# Altium PCB VIrtex_XC7vx690t_2ffg1927i_T_B.PcbDoc (part 4 of 5)
Units mm, origin at the board's own origin, x right, y up, seen from the top; angles counter-clockwise.
Board outline 230 x 148 mm, 12 copper layers (Top Layer 1, GND_IN_Layer, 1_V_IN_layer, 1.2_V_IN_layer, 1.8_V_IN_layer, 3.3_V_IN_layer, IN_Layer 6, IN_Layer 7, IN_Layer 8, IN_Layer 9, IN_Layer 10, Bottom Layer), stack 1.452 mm thick; 73 components, 655 nets, 2765 pads, 42 vias.
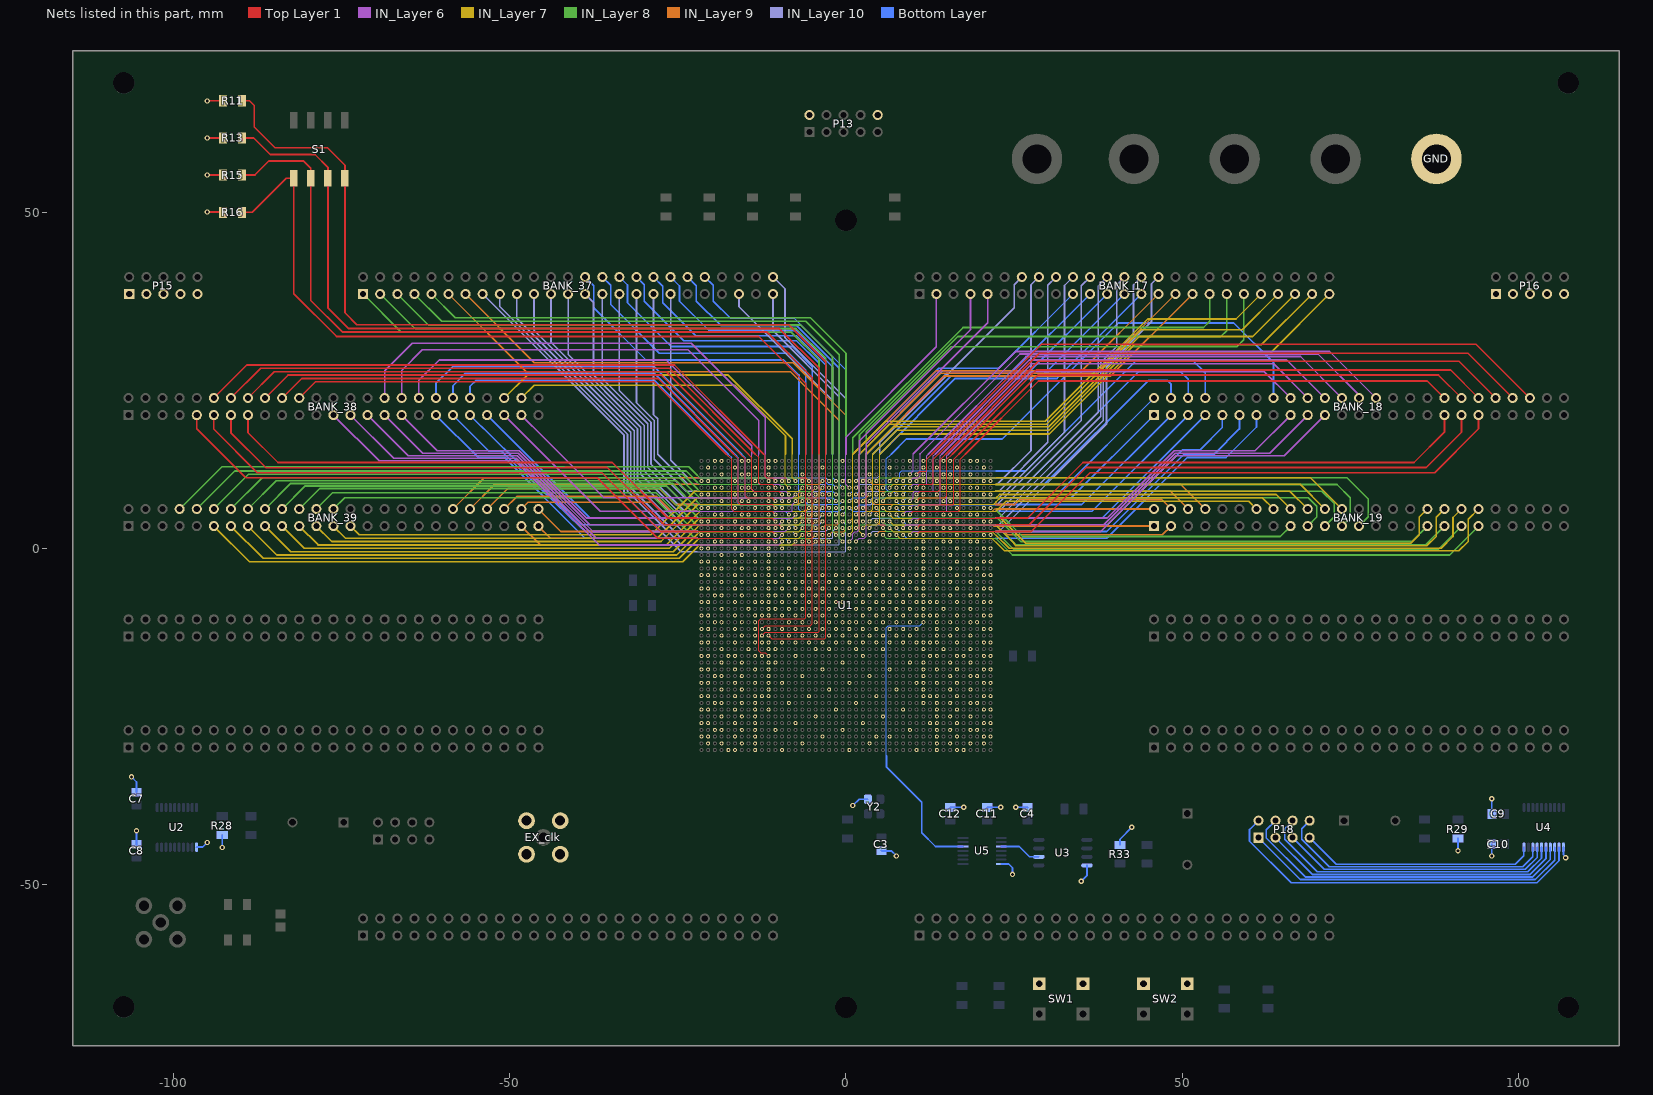
[diagram p14: the nets of this part, all layers, seen from the top]

## Via types
v1: diameter 0.8, hole 0.4, Top Layer 1 to Bottom Layer, 42 vias

## Nets (pads, with @x,y where several pads share a name; then routed paths per layer and width w, separated by ;. In a path a pad name is that pad's centre, name@x,y a point inside that pad or via, vN(x,y) a via of type N, cw(c..) or ccw(c..) an arc to the next point about the centre after c; other vN are vias at no path point) (continued)
C32: BANK_18.28 U1.C32 | length 81.2
  IN_Layer 6 w0.14: U1.C32@9.5,11 10.01,11.51 10.01,14
  IN_Layer 6 w0.254: 10.01,14 10.01,14.039 25.225,29.254 71.906,29.254 BANK_18.28@78.82,22.34
C33: BANK_18.46 U1.C33 | length 103.5
  Top Layer 1 w0.14: U1.C33@10.5,11 10.99,11.49 11.928,11.49 12.01,11.572 12.01,13.26 12.75,14
  Top Layer 1 w0.254: 12.75,14 29.081,30.331 93.689,30.331 BANK_18.46@101.68,22.34
CCLK_SPI_Flash: U3.6 U5.A2 | length 6.2
  Bottom Layer w0.254: U5.A2@23.1,-44.35 25.749,-44.35 27.284,-45.885 U3.6@28.675,-45.885
CCLK_SPI_Flash_1.8: U1.AE34 U5.B2 | length 45.5
  Bottom Layer w0.14: 6.01,-30.9 6.01,-11.797 6.307,-11.5 11,-11.5 U1.AE34@11.5,-11
  Bottom Layer w0.254: 6.01,-30.9 6.01,-32.51 11.25,-37.75 11.25,-42.298 13.302,-44.35 U5.B2@17.4,-44.35
CFG_BUS: R16.2 S1.1 U1.AK11 | length 156.9
  Top Layer 1 w0.14: U1.AK11@-11.5,-16 -11.99,-15.51 -12.683,-15.51 -12.99,-15.203 -12.99,-10.797 -12.703,-10.51 -6.149,-10.51 -6,-10.361 -6,14
  Top Layer 1 w0.254: R16.2@-89.81,49.945 -88.305,49.945 -83.21,55.04 S1.1@-82.12,55.04 -82.12,37.87 -75.75,31.5 -13,31.5 -6,24.5 -6,14
D12: BANK_38.12 U1.D12 | length 94.4
  Top Layer 1 w0.14: -12.25,14 -11.99,13.74 -11.99,10.74 -11.75,10.5 -11,10.5 U1.D12@-10.5,10
  Top Layer 1 w0.254: BANK_38.12@-94,22.34 -89.09,27.25 -25.5,27.25 -12.25,14
D14: BANK_38.32 U1.D14 | length 79.5
  IN_Layer 6 w0.14: -11.99,14 -11.99,10.629 -11.851,10.49 -8.99,10.49 U1.D14@-8.5,10
  IN_Layer 6 w0.254: BANK_38.32@-68.6,22.34 -68.6,26.4 -64.5,30.5 -23,30.5 -11.99,19.49 -11.99,14
D15: BANK_38.46 U1.D15 | length 54.6
  IN_Layer 7 w0.14: -8.01,14 -8.01,10.51 U1.D15@-7.5,10
  IN_Layer 7 w0.254: BANK_38.46@-50.82,22.34 -47.41,25.75 -17.497,25.75 -8.01,16.263 -8.01,14
D16: BANK_39.8 U1.D16 | length 96.1
  IN_Layer 8 w0.14: -22.1,10.85 -21.74,10.49 -6.99,10.49 U1.D16@-6.5,10
  IN_Layer 8 w0.254: BANK_39.8@-99.08,5.84 -92.794,12.126 -23.376,12.126 -22.1,10.85
D17: BANK_39.40 U1.D17 | length 55.1
  IN_Layer 9 w0.14: -22.1,10.5 -6,10.5 U1.D17@-5.5,10
  IN_Layer 9 w0.254: BANK_39.40@-58.44,5.84 -53.78,10.5 -22.1,10.5
D19: BANK_39.42 U1.D19 | length 54.1
  IN_Layer 9 w0.14: -22.1,9.5 -4,9.5 U1.D19@-3.5,10
  IN_Layer 9 w0.254: BANK_39.42@-55.9,5.84 -52.24,9.5 -22.1,9.5
D20: BANK_37.37 U1.D20 | length 49.6
  IN_Layer 10 w0.14: -22.1,10.5 -3,10.5 U1.D20@-2.5,10
  IN_Layer 10 w0.254: BANK_37.37@-26.08,37.8 -26.08,13.08 -23.5,10.5 -22.1,10.5
D21: BANK_37.38 U1.D21 | length 48.1
  Bottom Layer w0.14: -2,14.25 -2,10.5 U1.D21@-1.5,10
  Bottom Layer w0.254: BANK_37.38@-26.08,40.34 -24.75,39.01 -24.75,36.75 -20.377,32.377 -7.377,32.377 -2,27 -2,14.25
D22: BANK_37.42 U1.D22 | length 44.8
  Bottom Layer w0.14: U1.D22@-0.5,10 -0.449,10 -0.01,10.439 -0.01,14
  Bottom Layer w0.254: BANK_37.42@-21,40.34 -19.75,39.09 -19.75,36.75 -17.232,34.232 -7.732,34.232 -0.01,26.51 -0.01,14
D24: BANK_17.14 U1.D24 | length 42.1
  IN_Layer 10 w0.14: U1.D24@1.5,10 1.99,10.49 4.683,10.49 5.01,10.817 5.01,14
  IN_Layer 10 w0.254: 5.01,14 5.01,15.76 25,35.75 25,39.2 BANK_17.14@26.14,40.34
D25: BANK_17.33 U1.D25 | length 62.6
  IN_Layer 9 w0.14: U1.D25@2.5,10 3,10.5 3,14
  IN_Layer 9 w0.254: 3,14 14.631,25.631 39.371,25.631 BANK_17.33@51.54,37.8
D26: BANK_19.8 U1.D26 | length 51.6
  IN_Layer 9 w0.14: U1.D26@3.5,10 4.01,9.49 22.3,9.49
  IN_Layer 9 w0.254: 22.3,9.49 49.77,9.49 BANK_19.8@53.42,5.84
D27: BANK_19.25 U1.D27 | length 79.3
  IN_Layer 8 w0.14: U1.D27@4.5,10 5,10.5 22.3,10.5
  IN_Layer 8 w0.254: 22.3,10.5 74.5,10.5 77.67,7.33 77.67,4.69 BANK_19.25@76.28,3.3
D29: BANK_19.24 U1.D29 | length 69.4
  IN_Layer 7 w0.14: U1.D29@6.5,10 7,10.5 22.3,10.5
  IN_Layer 7 w0.254: 22.3,10.5 69.08,10.5 BANK_19.24@73.74,5.84
D30: BANK_18.8 U1.D30 | length 58.3
  Bottom Layer w0.14: U1.D30@7.5,10 8.01,10.51 8.01,11.203 8.307,11.5 22.3,11.5
  Bottom Layer w0.254: 22.3,11.5 26.75,11.5 43.25,28 51.5,28 53.42,26.08 BANK_18.8@53.42,22.34
D31: BANK_18.6 U1.D31 | length 52.4
  Bottom Layer w0.14: U1.D31@8.5,10 8.99,10.49 22.3,10.49
  Bottom Layer w0.254: 22.3,10.49 27.74,10.49 43.5,26.25 49.75,26.25 50.88,25.12 BANK_18.6@50.88,22.34
D32: BANK_18.26 U1.D32 | length 79.4
  IN_Layer 6 w0.14: U1.D32@9.5,10 9.99,10.49 10.683,10.49 11.01,10.817 11.01,14
  IN_Layer 6 w0.254: 11.01,14 11.01,14.01 25.88,28.88 70.191,28.88 76.042,23.03 76.042,22.578 BANK_18.26@76.28,22.34
E12: BANK_38.14 U1.E12 | length 92.3
  Top Layer 1 w0.14: -13.5,14 -13.01,13.51 -13.01,9.76 -12.74,9.49 -10.99,9.49 U1.E12@-10.5,9
  Top Layer 1 w0.254: BANK_38.14@-91.46,22.34 -87.05,26.75 -26.25,26.75 -13.5,14
E13: BANK_38.34 U1.E13 | length 75.9
  IN_Layer 6 w0.14: -12.99,14 -12.99,9.639 -12.851,9.5 -10,9.5 U1.E13@-9.5,9
  IN_Layer 6 w0.254: BANK_38.34@-66.06,22.34 -66.06,26.44 -63,29.5 -24,29.5 -23.5,29.5 -12.99,18.99 -12.99,14
E14: BANK_38.48 U1.E14 | length 51.1
  IN_Layer 7 w0.14: -9,14 -9,9.5 U1.E14@-8.5,9
  IN_Layer 7 w0.254: BANK_38.48@-48.28,22.34 -46.37,24.25 -16.526,24.25 -9,16.724 -9,14
E16: BANK_39.27 U1.E16 | length 70.6
  IN_Layer 7 w0.14: -22.1,8.49 -7.01,8.49 U1.E16@-6.5,9
  IN_Layer 7 w0.254: BANK_39.27@-73.68,3.3 -72.38,2 -29,2 -22.51,8.49 -22.1,8.49
E17: BANK_39.10 U1.E17 | length 94.4
  IN_Layer 8 w0.14: -22.1,9.826 -21.784,9.51 -6.01,9.51 U1.E17@-5.5,9
  IN_Layer 8 w0.254: BANK_39.10@-96.54,5.84 -90.88,11.5 -23.774,11.5 -22.1,9.826
E18: BANK_39.44 U1.E18 | length 53
  IN_Layer 9 w0.14: -22.1,6.51 -7.24,6.51 -7.01,6.74 -7.01,8.183 -6.683,8.51 -4.99,8.51 U1.E18@-4.5,9
  IN_Layer 9 w0.254: BANK_39.44@-53.36,5.84 -50.303,8.897 -27.77,8.897 -25.383,6.51 -22.1,6.51
E19: BANK_39.46 U1.E19 | length 51.7
  IN_Layer 9 w0.14: -22.1,5.5 -6.307,5.5 -6.005,5.802 -6.005,7.188 -5.703,7.49 -4.317,7.49 -4.01,7.797 -4.01,8.49 U1.E19@-3.5,9
  IN_Layer 9 w0.254: BANK_39.46@-50.82,5.84 -48.91,7.75 -28.222,7.75 -25.972,5.5 -22.1,5.5
E21: BANK_37.36 U1.E21 | length 51.8
  Bottom Layer w0.14: -3,14 -3,9.807 -2.693,9.5 -2,9.5 U1.E21@-1.5,9
  Bottom Layer w0.254: BANK_37.36@-28.62,40.34 -27.25,38.97 -27.25,36.5 -22.366,31.616 -7.366,31.616 -3,27.25 -3,14
E22: BANK_37.40 U1.E22 | length 47.5
  Bottom Layer w0.14: -1,14 -1,9.5 U1.E22@-0.5,9
  Bottom Layer w0.254: BANK_37.40@-23.54,40.34 -22.25,39.05 -22.25,36.75 -18.638,33.138 -7.388,33.138 -1,26.75 -1,14
E23: BANK_17.3 U1.E23 | length 34.6
  IN_Layer 6 w0.14: 0,14 0,9.5 U1.E23@0.5,9
  IN_Layer 6 w0.254: 0,14 0,16.5 13.44,29.94 BANK_17.3@13.44,37.8
E24: BANK_17.16 U1.E24 | length 54.6
  IN_Layer 10 w0.14: U1.E24@1.5,9 2,9.5 22.5,9.5
  IN_Layer 10 w0.254: 22.5,9.5 27.5,14.5 27.5,39.16 BANK_17.16@28.68,40.34
E26: BANK_19.4 U1.E26 | length 47.8
  IN_Layer 9 w0.14: U1.E26@3.5,9 3.99,8.51 3.99,6.817 4.297,6.51 22.3,6.51
  IN_Layer 9 w0.254: 22.3,6.51 25.091,6.51 25.831,7.25 46.93,7.25 BANK_19.4@48.34,5.84
E27: BANK_19.6 U1.E27 | length 47.7
  IN_Layer 9 w0.14: U1.E27@4.5,9 4.5,8.999 4.99,8.509 22.3,8.509
  IN_Layer 9 w0.254: 22.3,8.509 48.211,8.509 BANK_19.6@50.88,5.84
E28: BANK_19.23 U1.E28 | length 75.2
  IN_Layer 8 w0.14: U1.E28@5.5,9 5.99,9.49 22.3,9.49
  IN_Layer 8 w0.254: 22.3,9.49 73.01,9.49 75,7.5 75,4.56 BANK_19.23@73.74,3.3
E29: BANK_19.22 U1.E29 | length 66.4
  IN_Layer 7 w0.14: U1.E29@6.5,9 7,9.5 22.3,9.5
  IN_Layer 7 w0.254: 22.3,9.5 67.54,9.5 BANK_19.22@71.2,5.84
E31: BANK_18.4 U1.E31 | length 48.8
  Bottom Layer w0.14: U1.E31@8.5,9 9,9.5 22.3,9.5
  Bottom Layer w0.254: 22.3,9.5 29.5,9.5 45,25 47.75,25 48.34,24.41 BANK_18.4@48.34,22.34
E32: BANK_18.24 U1.E32 | length 77.3
  IN_Layer 6 w0.14: U1.E32@9.5,9 10,9.5 11.918,9.5 12,9.582 12,13.75 12.25,14
  IN_Layer 6 w0.254: 12.25,14 26.756,28.506 67.574,28.506 BANK_18.24@73.74,22.34
E33: BANK_18.44 U1.E33 | length 101.7
  Top Layer 1 w0.14: U1.E33@10.5,9 10.99,9.49 12.74,9.49 12.99,9.74 12.99,13.24 13.75,14
  Top Layer 1 w0.254: 13.75,14 28.75,29 92.48,29 BANK_18.44@99.14,22.34
F13: BANK_38.16 U1.F13 | length 91.3
  Top Layer 1 w0.14: -14.5,14 -13.99,13.49 -13.99,8.797 -13.703,8.51 -10.01,8.51 U1.F13@-9.5,8
  Top Layer 1 w0.254: BANK_38.16@-88.92,22.34 -85.01,26.25 -26.75,26.25 -14.5,14
F14: BANK_38.36 U1.F14 | length 71
  IN_Layer 6 w0.14: -14.01,14 -14.01,8.76 -13.74,8.49 -8.99,8.49 U1.F14@-8.5,8
  IN_Layer 6 w0.254: BANK_38.36@-63.52,22.34 -63.52,24.98 -60.5,28 -26.75,28 -14.01,15.26 -14.01,14
F15: BANK_38.47 U1.F15 | length 46.1
  IN_Layer 6 w0.14: -22.1,7.51 -7.99,7.51 U1.F15@-7.5,8
  IN_Layer 6 w0.254: BANK_38.47@-48.28,19.8 -44.81,16.331 -35.99,7.51 -22.1,7.51
F16: BANK_39.25 U1.F16 | length 73.2
  IN_Layer 7 w0.14: -22.1,7.49 -7.01,7.49 U1.F16@-6.5,8
  IN_Layer 7 w0.254: BANK_39.25@-76.22,3.3 -74.42,1.5 -28.09,1.5 -22.1,7.49
F18: BANK_39.12 U1.F18 | length 92.9
  IN_Layer 8 w0.14: -22.1,8.826 -21.784,8.51 -5.01,8.51 U1.F18@-4.5,8
  IN_Layer 8 w0.254: BANK_39.12@-94,5.84 -88.84,11 -24.274,11 -22.1,8.826
F19: BANK_37.33 U1.F19 | length 52.8
  IN_Layer 10 w0.14: -22.1,8.5 -4,8.5 U1.F19@-3.5,8
  IN_Layer 10 w0.254: BANK_37.33@-31.16,37.8 -31.16,21.66 -28.5,19 -28.5,13.25 -23.75,8.5 -22.1,8.5
F20: BANK_37.35 U1.F20 | length 52.4
  IN_Layer 10 w0.14: -22.1,9.5 -3.307,9.5 -2.99,9.183 -2.99,8.49 U1.F20@-2.5,8
  IN_Layer 10 w0.254: BANK_37.35@-28.62,37.8 -28.62,19.87 -28,19.25 -28,14 -23.5,9.5 -22.1,9.5
F21: BANK_37.34 U1.F21 | length 55.4
  Bottom Layer w0.14: -4,14 -4,8.807 -3.683,8.49 -1.99,8.49 U1.F21@-1.5,8
  Bottom Layer w0.254: BANK_37.34@-31.16,40.34 -30,39.18 -30,36.75 -24.105,30.855 -7.355,30.855 -4,27.5 -4,14
F23: BANK_17.19 U1.F23 | length 48.8
  Bottom Layer w0.14: U1.F23@0.5,8 1,8.5 1,13.967 1.033,14
  Bottom Layer w0.254: 1.033,14 13.786,26.753 22.713,26.753 BANK_17.19@33.76,37.8
F24: BANK_17.21 U1.F24 | length 50.4
  Bottom Layer w0.14: U1.F24@1.5,8 2,8.5 2,14
  Bottom Layer w0.254: 2,14 14.379,26.379 24.879,26.379 BANK_17.21@36.3,37.8
F25: BANK_17.18 U1.F25 | length 55.8
  IN_Layer 10 w0.14: U1.F25@2.5,8 3,8.5 22.75,8.5
  IN_Layer 10 w0.254: 22.75,8.5 30,15.75 30,39.12 BANK_17.18@31.22,40.34
F26: BANK_19.2 U1.F26 | length 45.6
  IN_Layer 9 w0.14: U1.F26@3.5,8 3,7.5 3,5.592 3.082,5.51 21.784,5.51 22.114,5.84 22.3,5.84
  IN_Layer 9 w0.254: 22.3,5.84 BANK_19.2@45.8,5.84
F28: BANK_19.21 U1.F28 | length 72
  IN_Layer 8 w0.14: U1.F28@5.5,8 6,8.5 22.3,8.5
  IN_Layer 8 w0.254: 22.3,8.5 70.75,8.5 72.59,6.66 72.59,4.69 BANK_19.21@71.2,3.3
F29: BANK_19.20 U1.F29 | length 63.5
  IN_Layer 7 w0.14: U1.F29@6.5,8 7,8.5 22.3,8.5
  IN_Layer 7 w0.254: 22.3,8.5 66,8.5 BANK_19.20@68.66,5.84
F30: BANK_18.16 U1.F30 | length 80
  Bottom Layer w0.14: 6.721,14 6,13.279 6,8.75 6.26,8.49 7.01,8.49 U1.F30@7.5,8
  Bottom Layer w0.254: 6.721,14 8.971,16.25 23.25,16.25 40.5,33.5 57.66,33.5 63.58,27.58 BANK_18.16@63.58,22.34
F31: BANK_18.2 U1.F31 | length 43.2
  Bottom Layer w0.14: U1.F31@8.5,8 8.99,8.49 22.3,8.49
  Bottom Layer w0.254: 22.3,8.49 31.95,8.49 BANK_18.2@45.8,22.34
F33: BANK_18.42 U1.F33 | length 99.1
  Top Layer 1 w0.14: U1.F33@10.5,8 11.01,8.51 13.703,8.51 14,8.807 14,13.193 14.807,14
  Top Layer 1 w0.254: 14.807,14 28.598,27.791 91.149,27.791 BANK_18.42@96.6,22.34
G12: BANK_38.18 U1.G12 | length 88.3
  Top Layer 1 w0.14: -15.693,14 -15.01,13.317 -15.01,7.817 -14.703,7.51 -11.01,7.51 U1.G12@-10.5,7
  Top Layer 1 w0.254: BANK_38.18@-86.38,22.34 -82.97,25.75 -27.443,25.75 -15.693,14
G13: BANK_38.38 U1.G13 | length 66.4
  Bottom Layer w0.14: -15.5,14 -14.99,13.49 -14.99,7.582 -14.908,7.5 -10,7.5 U1.G13@-9.5,7
  Bottom Layer w0.254: BANK_38.38@-60.98,22.34 -60.98,24.52 -58.5,27 -28.5,27 -15.5,14
G15: BANK_38.45 U1.G15 | length 50.5
  IN_Layer 6 w0.14: -22.1,5.5 -8.082,5.5 -8,5.582 -8,6.5 U1.G15@-7.5,7
  IN_Layer 6 w0.254: BANK_38.45@-50.82,19.8 -36.52,5.5 -22.1,5.5
  Bottom Layer w0.14: U1.G15@-7.673,7.021 U1.G15@-7.59,7.021
G16: BANK_39.23 U1.G16 | length 75.7
  IN_Layer 7 w0.14: -22.1,6.4 -21.99,6.51 -6.99,6.51 U1.G16@-6.5,7
  IN_Layer 7 w0.254: BANK_39.23@-78.76,3.3 -76.46,1 -27.5,1 -22.1,6.4
G17: BANK_39.14 U1.G17 | length 89.3
  IN_Layer 8 w0.14: -22.1,7.85 -21.76,7.51 -6.01,7.51 U1.G17@-5.5,7
  IN_Layer 8 w0.254: BANK_39.14@-91.46,5.84 -86.8,10.5 -24.75,10.5 -22.1,7.85
G18: BANK_39.48 U1.G18 | length 47.2
  IN_Layer 9 w0.14: -22.1,4.52 -21.794,4.52 -21.784,4.51 -5.206,4.51 -4.99,4.726 -4.99,6.51 U1.G18@-4.5,7
  IN_Layer 9 w0.254: BANK_39.48@-48.28,5.84 -47.283,6.837 -28.837,6.837 -26.52,4.52 -22.1,4.52
G20: BANK_37.31 U1.G20 | length 56
  IN_Layer 10 w0.14: -22.1,7.5 -3,7.5 U1.G20@-2.5,7
  IN_Layer 10 w0.254: BANK_37.31@-33.7,37.8 -33.7,23.45 -29,18.75 -29,12.5 -24,7.5 -22.1,7.5
G21: BANK_37.32 U1.G21 | length 58.8
  Bottom Layer w0.14: -5,14 -5,7.807 -4.683,7.49 -1.99,7.49 U1.G21@-1.5,7
  Bottom Layer w0.254: BANK_37.32@-33.7,40.34 -32.5,39.14 -32.5,36.5 -26,30 -8,30 -5,27 -5,14
G22: BANK_37.30 U1.G22 | length 63.2
  Bottom Layer w0.14: -6,14 -6,6.807 -5.703,6.51 -0.99,6.51 U1.G22@-0.5,7
  Bottom Layer w0.254: BANK_37.30@-36.24,40.34 -35,39.1 -35,36.25 -27.75,29 -8.5,29 -6,26.5 -6,14
G23: BANK_17.23 U1.G23 | length 54.7
  Bottom Layer w0.14: U1.G23@0.5,7 0.99,7.49 2.683,7.49 3,7.807 3,14
  Bottom Layer w0.254: 3,14 15.005,26.005 27.045,26.005 BANK_17.23@38.84,37.8
G25: BANK_17.45 U1.G25 | length 80.8
  IN_Layer 7 w0.14: U1.G25@2.5,7 3.01,7.51 3.01,14
  IN_Layer 7 w0.254: 3.01,14 3.01,14.01 7.064,18.064 30.155,18.064 43.591,31.5 60.48,31.5 BANK_17.45@66.78,37.8
G26: BANK_17.20 U1.G26 | length 56.9
  IN_Layer 10 w0.14: U1.G26@3.5,7 4,7.5 22.75,7.5
  IN_Layer 10 w0.254: 22.75,7.5 32.5,17.25 32.5,39.08 BANK_17.20@33.76,40.34
G27: BANK_19.19 U1.G27 | length 69.7
  IN_Layer 8 w0.14: U1.G27@4.5,7 5,7.5 22.3,7.5
  IN_Layer 8 w0.254: 22.3,7.5 68.75,7.5 70,6.25 70,4.64 BANK_19.19@68.66,3.3
G28: BANK_19.18 U1.G28 | length 61.9
  IN_Layer 7 w0.14: U1.G28@5.5,7 5.99,7.49 22.3,7.49
  IN_Layer 7 w0.254: 22.3,7.49 22.321,7.49 22.831,8 63.96,8 BANK_19.18@66.12,5.84
G30: BANK_18.3 U1.G30 | length 46.6
  Bottom Layer w0.14: U1.G30@7.5,7 8,6.5 22.3,6.5
  Bottom Layer w0.254: 22.3,6.5 35.04,6.5 BANK_18.3@48.34,19.8
G31: BANK_18.1 U1.G31 | length 42.6
  Bottom Layer w0.14: U1.G31@8.5,7 9.01,7.51 22.3,7.51
  Bottom Layer w0.254: 22.3,7.51 33.51,7.51 BANK_18.1@45.8,19.8
G32: BANK_18.22 U1.G32 | length 76.2
  IN_Layer 6 w0.14: U1.G32@9.5,7 10,7.5 10,8.25 10.25,8.5 12.908,8.5 12.99,8.582 12.99,13.74 13.25,14
  IN_Layer 6 w0.254: 13.25,14 27.25,28 65.54,28 BANK_18.22@71.2,22.34
G33: BANK_18.40 U1.G33 | length 96.5
  Top Layer 1 w0.14: U1.G33@10.5,7 10.99,7.49 14.683,7.49 15.01,7.817 15.01,13.203 15.807,14
  Top Layer 1 w0.254: 15.807,14 28.307,26.5 89.9,26.5 BANK_18.40@94.06,22.34
GND: C3.1 C4.1 C7.1 C8.1 C9.1 C10.1 C11.1 C12.1 EX_clk.2 GND.1 P13.2 P13.10 P15.1 P15.3 P15.5 P15.7 P15.9 P16.1 P16.3 P16.5 P16.7 P16.9 R11.1 R13.1 R15.1 R16.1 R28.1 R29.1 R33.1 SW1.3 SW1.4 SW2.3 SW2.4 U1.A3 U1.A4 U1.A7 U1.A8 U1.A11 U1.A12 U1.A22 U1.A32 U1.A34 U1.A37 U1.A38 U1.A41 U1.A42 U1.AA3 U1.AA4 U1.AA7 U1.AA11 U1.AA12 U1.AA14 U1.AA16 U1.AA18 U1.AA20 U1.AA22 U1.AA24 U1.AA26 U1.AA28 U1.AA30 U1.AA32 U1.AA34 U1.AA38 U1.AA41 U1.AA42 U1.AB1 U1.AB2 U1.AB6 U1.AB9 U1.AB10 U1.AB11 U1.AB13 U1.AB15 U1.AB17 U1.AB19 U1.AB21 U1.AB22 U1.AB25 U1.AB27 U1.AB29 U1.AB31 U1.AB33 U1.AB34 U1.AB35 U1.AB36 U1.AB39 U1.AB43 U1.AB44 U1.AC4 U1.AC8 U1.AC11 U1.AC12 U1.AC14 U1.AC16 U1.AC18 U1.AC20 U1.AC22 U1.AC24 U1.AC26 U1.AC28 U1.AC30 U1.AC32 U1.AC34 U1.AC37 U1.AC41 U1.AD1 U1.AD2 U1.AD6 U1.AD9 U1.AD10 U1.AD11 U1.AD13 U1.AD15 U1.AD17 U1.AD19 U1.AD21 U1.AD25 U1.AD27 U1.AD29 U1.AD31 U1.AD33 U1.AD34 U1.AD35 U1.AD36 U1.AD39 U1.AD43 U1.AD44 U1.AE3 U1.AE4 U1.AE7 U1.AE9 U1.AE14 U1.AE16 U1.AE18 U1.AE20 U1.AE22 U1.AE23 U1.AE24 U1.AE26 U1.AE28 U1.AE30 U1.AE32 U1.AE36 U1.AE38 U1.AE41 U1.AE42 U1.AF1 U1.AF2 U1.AF6 U1.AF9 U1.AF11 U1.AF13 U1.AF15 U1.AF17 U1.AF19 U1.AF21 U1.AF23 U1.AF25 U1.AF27 U1.AF29 U1.AF31 U1.AF33 U1.AF36 U1.AF39 U1.AF43 U1.AF44 U1.AG4 U1.AG7 U1.AG9 U1.AG14 U1.AG16 U1.AG18 U1.AG20 U1.AG22 U1.AG24 U1.AG26 U1.AG28 U1.AG30 U1.AG32 U1.AG36 U1.AG38 U1.AG41 U1.AH1 U1.AH2 U1.AH6 U1.AH9 U1.AH10 U1.AH11 U1.AH13 U1.AH15 U1.AH17 U1.AH19 U1.AH21 U1.AH23 U1.AH25 U1.AH27 U1.AH29 U1.AH31 U1.AH33 U1.AH34 U1.AH35 U1.AH36 U1.AH39 U1.AH43 U1.AH44 U1.AJ4 U1.AJ8 U1.AJ11 U1.AJ12 U1.AJ18 U1.AJ20 U1.AJ24 U1.AJ28 U1.AJ34 U1.AJ37 U1.AJ41 U1.AK1 U1.AK2 U1.AK5 U1.AK6 U1.AK9 U1.AK10 U1.AK15 U1.AK25 U1.AK35 U1.AK36 U1.AK39 U1.AK40 U1.AK43 U1.AK44 U1.AL4 U1.AL7 U1.AL11 U1.AL12 U1.AL22 U1.AL32 U1.AL34 U1.AL38 U1.AL41 U1.AM1 U1.AM2 U1.AM6 U1.AM9 U1.AM11 U1.AM19 U1.AM29 U1.AM34 U1.AM36 U1.AM39 U1.AM43 U1.AM44 U1.AN3 U1.AN4 U1.AN7 U1.AN11 U1.AN16 U1.AN26 U1.AN34 U1.AN38 U1.AN41 U1.AN42 U1.AP1 U1.AP2 U1.AP6 U1.AP9 U1.AP11 U1.AP13 U1.AP23 U1.AP33 U1.AP34 U1.AP36 U1.AP39 U1.AP43 U1.AP44 U1.AR4 U1.AR7 U1.AR11 U1.AR20 U1.AR30 U1.AR34 U1.AR38 U1.AR41 U1.AT1 U1.AT2 U1.AT6 U1.AT9 U1.AT10 U1.AT11 U1.AT17 U1.AT27 U1.AT34 U1.AT35 U1.AT36 U1.AT39 U1.AT43 U1.AT44 U1.AU3 U1.AU4 U1.AU7 U1.AU9 U1.AU14 U1.AU24 U1.AU34 U1.AU36 U1.AU38 U1.AU41 U1.AU42 U1.AV1 U1.AV2 U1.AV6 U1.AV9 U1.AV11 U1.AV21 U1.AV31 U1.AV36 U1.AV39 U1.AV43 U1.AV44 U1.AW4 U1.AW7 U1.AW9 U1.AW18 U1.AW28 U1.AW36 U1.AW38 U1.AW41 U1.AY1 U1.AY2 U1.AY6 U1.AY9 U1.AY15 U1.AY25 U1.AY35 U1.AY36 U1.AY39 U1.AY43 U1.AY44 U1.B2 U1.B6 U1.B9 U1.B11 U1.B19 U1.B29 U1.B34 U1.B36 U1.B39 U1.B43 U1.BA3 U1.BA4 U1.BA7 U1.BA9 U1.BA12 U1.BA22 U1.BA32 U1.BA36 U1.BA38 U1.BA41 U1.BA42 U1.BB1 U1.BB2 U1.BB6 U1.BB9 U1.BB19 U1.BB27 U1.BB29 U1.BB36 U1.BB39 U1.BB43 U1.BB44 U1.BC2 U1.BC4 U1.BC7 U1.BC9 U1.BC16 U1.BC26 U1.BC36 U1.BC38 U1.BC41 U1.BC43 U1.BD5 U1.BD6 U1.BD9 U1.BD13 U1.BD23 U1.BD33 U1.BD36 U1.BD39 U1.BD40 U1.C4 U1.C7 U1.C8 U1.C11 U1.C16 U1.C26 U1.C34 U1.C37 U1.C38 U1.C41 U1.D1 U1.D2 U1.D6 U1.D9 U1.D11 U1.D13 U1.D23 U1.D33 U1.D34 U1.D36 U1.D39 U1.D43 U1.D44 U1.E3 U1.E4 U1.E7 U1.E8 U1.E11 U1.E20 U1.E30 U1.E34 U1.E37 U1.E38 U1.E41 U1.E42 U1.F1 U1.F2 U1.F6 U1.F9 U1.F11 U1.F17 U1.F27 U1.F34 U1.F36 U1.F39 U1.F43 U1.F44 U1.G4 U1.G7 U1.G8 U1.G11 U1.G14 U1.G24 U1.G34 U1.G37 U1.G38 U1.G41 U1.H1 U1.H2 U1.H6 U1.H9 U1.H11 U1.H21 U1.H31 U1.H34 U1.H36 U1.H39 U1.H43 U1.H44 U1.J3 U1.J4 U1.J7 U1.J8 U1.J11 U1.J18 U1.J28 U1.J34 U1.J37 U1.J38 U1.J41 U1.J42 U1.K1 U1.K2 U1.K6 U1.K9 U1.K11 U1.K15 U1.K25 U1.K34 U1.K36 U1.K39 U1.K43 U1.K44 U1.L4 U1.L7 U1.L8 U1.L11 U1.L12 U1.L22 U1.L32 U1.L34 U1.L37 U1.L38 U1.L41 U1.M1 U1.M2 U1.M6 U1.M9 U1.M11 U1.M19 U1.M29 U1.M34 U1.M36 U1.M39 U1.M43 U1.M44 U1.N3 U1.N4 U1.N7 U1.N8 U1.N11 U1.N16 U1.N26 U1.N34 U1.N37 U1.N38 U1.N41 U1.N42 U1.P1 U1.P2 U1.P6 U1.P9 U1.P11 U1.P13 U1.P23 U1.P33 U1.P34 U1.P36 U1.P39 U1.P43 U1.P44 U1.R4 U1.R7 U1.R11 U1.R20 U1.R30 U1.R34 U1.R38 U1.R41 U1.T1 U1.T2 U1.T6 U1.T9 U1.T11 U1.T17 U1.T27 U1.T34 U1.T36 U1.T39 U1.T43 U1.T44 U1.U3 U1.U4 U1.U7 U1.U11 U1.U14 U1.U24 U1.U34 U1.U38 U1.U41 U1.U42 U1.V1 U1.V2 U1.V6 U1.V9 U1.V11 U1.V13 U1.V17 U1.V19 U1.V21 U1.V23 U1.V25 U1.V27 U1.V29 U1.V31 U1.V33 U1.V34 U1.V36 U1.V39 U1.V43 U1.V44 U1.W4 U1.W7 U1.W11 U1.W12 U1.W14 U1.W16 U1.W18 U1.W20 U1.W22 U1.W24 U1.W26 U1.W28 U1.W30 U1.W32 U1.W34 U1.W38 U1.W41 U1.Y1 U1.Y2 U1.Y6 U1.Y9 U1.Y11 U1.Y13 U1.Y15 U1.Y17 U1.Y19 U1.Y21 U1.Y23 U1.Y25 U1.Y27 U1.Y29 U1.Y31 U1.Y33 U1.Y34 U1.Y36 U1.Y39 U1.Y43 U1.Y44 U2.GND U3.4 U4.GND U5.GND Y2.2 | length 45.5
  Top Layer 1 w0.254: v1(-95,50) R16.1@-92.61,50 ; v1(-95,55.5) -92.632,55.5 R15.1@-92.61,55.478 ; v1(-95,61) -92.698,61 R13.1@-92.648,61.05 ; v1(-95,66.5) -94.955,66.545 R11.1@-92.61,66.545
  IN_Layer 6 w0.14: U1.D13@-9.533,9.967 U1.D13@-9.5,10
  Bottom Layer w0.254: v1(-106.25,-34) -105.5,-34.75 C7.1@-105.5,-36.3 ; C8.1@-105.5,-44.05 v1(-105.5,-42) ; U2.GND@-96.575,-44.45 -96.522,-44.45 -96.484,-44.412 -95.663,-44.412 v1(-95,-43.75) ; v1(-92.75,-44.5) R28.1@-92.75,-42.65 ; v1(1,-38.25) 1.95,-37.3 Y2.2@3.25,-37.3 ; C3.1@5.25,-44.95 5.3,-45 6.75,-45 v1(7.5,-45.75) ; C12.1@15.5,-38.55 15.55,-38.5 v1(17.5,-38.5) ; C11.1@21,-38.55 21.05,-38.5 v1(23,-38.5) ; U5.GND@23.1,-46.95 24.2,-46.95 24.75,-47.5 v1(24.75,-48.5) ; v1(25.25,-38.5) 26.95,-38.5 C4.1@27,-38.55 ; v1(35,-49.5) 35.825,-48.675 U3.4@35.825,-47.155 ; R33.1@40.75,-44.1 40.75,-43.25 v1(42.5,-41.5) ; v1(91,-45) R29.1@91,-43.15 ; v1(96,-45.75) 96,-44.05 C10.1@96.05,-44 ; v1(96,-37.25) 96,-39.45 C9.1@96.05,-39.5 ; U4.GND@106.675,-44.45 106.675,-45.531 107,-45.856 v1(107,-46)
H12: BANK_38.20 U1.H12 | length 86.3
  Top Layer 1 w0.14: -16.693,14 -16.01,13.317 -16.01,6.817 -15.703,6.51 -11.01,6.51 U1.H12@-10.5,6
  Top Layer 1 w0.254: BANK_38.20@-83.84,22.34 -80.93,25.25 -27.943,25.25 -16.693,14
H13: BANK_38.40 U1.H13 | length 63.9
  Bottom Layer w0.14: -16.5,14 -15.99,13.49 -15.99,12.203 -15.99,6.582 -15.908,6.5 -10,6.5 U1.H13@-9.5,6
  Bottom Layer w0.254: BANK_38.40@-58.44,22.34 -58.44,24.187 -56.627,26 -28.5,26 -16.5,14
H17: BANK_39.21 U1.H17 | length 79.2
  IN_Layer 7 w0.14: -22.1,5.093 -21.703,5.49 -6.01,5.49 U1.H17@-5.5,6
  IN_Layer 7 w0.254: BANK_39.21@-81.3,3.3 -78.5,0.5 -26.693,0.5 -22.1,5.093
H18: BANK_39.16 U1.H18 | length 87.8
  IN_Layer 8 w0.14: -22.1,6.907 -21.99,6.797 -21.683,6.49 -4.99,6.49 U1.H18@-4.5,6
  IN_Layer 8 w0.254: BANK_39.16@-88.92,5.84 -84.741,10.019 -25.212,10.019 -22.1,6.907
H19: BANK_37.27 U1.H19 | length 59.1
  IN_Layer 10 w0.14: -22.1,5.5 -4,5.5 U1.H19@-3.5,6
  IN_Layer 10 w0.254: BANK_37.27@-38.78,37.8 -37.561,36.581 -37.561,25.811 -30,18.25 -30,11.5 -24,5.5 -22.1,5.5
H20: BANK_37.29 U1.H20 | length 58.1
  IN_Layer 10 w0.14: -22.1,6.5 -3,6.5 U1.H20@-2.5,6
  IN_Layer 10 w0.254: BANK_37.29@-36.24,37.8 -36.24,25.24 -29.5,18.5 -29.5,12 -24,6.5 -22.1,6.5
H22: BANK_37.28 U1.H22 | length 66.5
  Bottom Layer w0.14: -7,14 -7,5.807 -6.703,5.51 -0.99,5.51 U1.H22@-0.5,6
  Bottom Layer w0.254: BANK_37.28@-38.78,40.34 -37.5,39.06 -37.5,35.75 -29.75,28 -9.25,28 -7,25.75 -7,14
H23: BANK_17.27 U1.H23 | length 61.8
  Bottom Layer w0.14: U1.H23@0.5,6 0.99,5.51 4.703,5.51 5,5.807 5,14
  Bottom Layer w0.254: 5,14 16.257,25.257 31.377,25.257 BANK_17.27@43.92,37.8
H24: BANK_17.25 U1.H24 | length 57.3
  Bottom Layer w0.14: U1.H24@1.5,6 1.99,6.49 3.683,6.49 4,6.807 4,14
  Bottom Layer w0.254: 4,14 15.631,25.631 29.211,25.631 BANK_17.25@41.38,37.8
H25: BANK_17.22 U1.H25 | length 59.8
  IN_Layer 10 w0.14: U1.H25@2.5,6 3.01,6.51 22.3,6.51
  IN_Layer 10 w0.254: 22.3,6.51 22.51,6.51 35,19 35,39.04 BANK_17.22@36.3,40.34
H27: BANK_19.17 U1.H27 | length 64
  IN_Layer 8 w0.14: U1.H27@4.5,6 5,5.5 22.3,5.5
  IN_Layer 8 w0.254: 22.3,5.5 22.5,5.5 26.25,1.75 64.57,1.75 BANK_19.17@66.12,3.3
H28: BANK_19.14 U1.H28 | length 56.8
  IN_Layer 7 w0.14: U1.H28@5.5,6 5.99,5.51 22.3,5.51
  IN_Layer 7 w0.254: 22.3,5.51 23.79,7 59.88,7 BANK_19.14@61.04,5.84
H29: BANK_19.16 U1.H29 | length 58.4
  IN_Layer 7 w0.14: U1.H29@6.5,6 7.01,6.51 21.939,6.51 22.3,6.871
  IN_Layer 7 w0.254: 22.3,6.871 22.929,7.5 61.92,7.5 BANK_19.16@63.58,5.84
H30: BANK_18.5 U1.H30 | length 49.5
  Bottom Layer w0.14: U1.H30@7.5,6 8,5.5 22.3,5.5
  Bottom Layer w0.254: 22.3,5.5 36.58,5.5 BANK_18.5@50.88,19.8
H32: BANK_18.20 U1.H32 | length 74.3
  IN_Layer 6 w0.14: U1.H32@9.5,6 9.99,6.49 13.918,6.49 14,6.572 14,13.75 14.25,14
  IN_Layer 6 w0.254: 14.25,14 27.667,27.417 63.583,27.417 BANK_18.20@68.66,22.34
H33: BANK_18.38 U1.H33 | length 94.5
  Top Layer 1 w0.14: U1.H33@10.5,6 11,6.5 15.928,6.5 16.01,6.582 16.01,13.26 16.75,14
  Top Layer 1 w0.254: 16.75,14 28.5,25.75 88.11,25.75 BANK_18.38@91.52,22.34
J12: BANK_38.22 U1.J12 | length 84.3
  Top Layer 1 w0.14: -17.807,14 -17.01,13.203 -17.01,5.817 -16.683,5.49 -10.99,5.49 U1.J12@-10.5,5
  Top Layer 1 w0.254: BANK_38.22@-81.3,22.34 -78.89,24.75 -28.557,24.75 -17.807,14
J14: BANK_38.42 U1.J14 | length 62.3
  Bottom Layer w0.14: -17.5,14 -17.01,13.51 -17.01,5.797 -16.713,5.5 -9,5.5 U1.J14@-8.5,5
  Bottom Layer w0.254: BANK_38.42@-55.9,22.34 -55.9,24.1 -55,25 -28.5,25 -17.5,14
J15: BANK_38.33 U1.J15 | length 65.1
  IN_Layer 6 w0.14: -22.05,4.49 -8.01,4.49 U1.J15@-7.5,5
  IN_Layer 6 w0.254: BANK_38.33@-66.06,19.8 -60.76,14.5 -48.569,14.5 -38.559,4.49 -22.05,4.49
J16: BANK_39.19 U1.J16 | length 80.8
  IN_Layer 7 w0.14: -22.1,4.15 -21.75,4.5 -7,4.5 U1.J16@-6.5,5
  IN_Layer 7 w0.254: BANK_39.19@-83.84,3.3 -80.54,0 -26.25,0 -22.1,4.15
J17: BANK_39.18 U1.J17 | length 84.4
  IN_Layer 8 w0.14: -22.1,5.907 -21.683,5.49 -5.99,5.49 U1.J17@-5.5,5
  IN_Layer 8 w0.254: BANK_39.18@-86.38,5.84 -82.575,9.645 -25.838,9.645 -22.1,5.907
J19: BANK_37.25 U1.J19 | length 61.2
  IN_Layer 10 w0.14: -22.1,4.5 -4,4.5 U1.J19@-3.5,5
  IN_Layer 10 w0.254: BANK_37.25@-41.32,37.8 -41.32,28.82 -30.5,18 -30.5,11 -24,4.5 -22.1,4.5
J20: BANK_37.45 U1.J20 | length 38.8
  IN_Layer 10 w0.14: U1.J20@-2.5,5 -2,5.5 -2,14
  IN_Layer 10 w0.254: BANK_37.45@-15.92,37.8 -15.92,35.92 -2,22 -2,14
J21: BANK_37.49 U1.J21 | length 37.1
  IN_Layer 10 w0.14: U1.J21@-1.5,5 -1,5.5 -1,14
  IN_Layer 10 w0.254: BANK_37.49@-10.84,37.8 -10.84,32.34 -1,22.5 -1,14
J22: BANK_37.50 U1.J22 | length 40
  IN_Layer 10 w0.14: U1.J22@-0.5,5 0,5.5 0,14
  IN_Layer 10 w0.254: BANK_37.50@-10.84,40.34 -9.08,38.58 -9.08,31.33 0,22.25 0,14
J24: BANK_17.31 U1.J24 | length 66.1
  IN_Layer 9 w0.14: U1.J24@1.5,5 2,5.5 2,14
  IN_Layer 9 w0.254: 2,14 14.005,26.005 37.205,26.005 BANK_17.31@49,37.8
J25: BANK_17.47 U1.J25 | length 85.2
  IN_Layer 7 w0.14: U1.J25@2.5,5 2.99,5.49 3.683,5.49 4,5.807 4,14
  IN_Layer 7 w0.254: 4,14 7.562,17.562 30.182,17.562 42.87,30.25 61.77,30.25 BANK_17.47@69.32,37.8
J26: BANK_17.24 U1.J26 | length 61
  IN_Layer 10 w0.14: U1.J26@3.5,5 4,5.5 22.75,5.5
  IN_Layer 10 w0.254: 22.75,5.5 37.5,20.25 37.5,39 BANK_17.24@38.84,40.34
J27: BANK_19.33 U1.J27 | length 84.5
  IN_Layer 8 w0.14: U1.J27@4.5,5 4.99,4.51 22.3,4.51
  IN_Layer 8 w0.254: 22.3,4.51 22.49,4.51 26,1 84.14,1 BANK_19.33@86.44,3.3
J29: BANK_19.34 U1.J29 | length 85.4
  IN_Layer 7 w0.14: U1.J29@6.5,5 7.01,4.49 22.3,4.49
  IN_Layer 7 w0.254: 22.3,4.49 23.004,4.49 26.75,0.744 83.994,0.744 85.25,2 85.25,4.65 BANK_19.34@86.44,5.84
J30: BANK_18.7 U1.J30 | length 52.5
  Bottom Layer w0.14: U1.J30@7.5,5 8,4.5 22.3,4.5
  Bottom Layer w0.254: 22.3,4.5 38.12,4.5 BANK_18.7@53.42,19.8
J31: BANK_18.18 U1.J31 | length 72.8
  IN_Layer 6 w0.14: U1.J31@8.5,5 8.99,5.49 14.928,5.49 15.01,5.572 15.01,13.76 15.25,14
  IN_Layer 6 w0.254: 15.25,14 27.5,26.25 62.21,26.25 BANK_18.18@66.12,22.34
J32: BANK_18.36 U1.J32 | length 93.1
  Top Layer 1 w0.14: U1.J32@9.5,5 9.99,5.49 16.683,5.49 16.99,5.797 16.99,13.24 17.75,14
  Top Layer 1 w0.254: 17.75,14 28.627,24.877 86.443,24.877 BANK_18.36@88.98,22.34
K12: BANK_38.15 U1.K12 | length 86.5
  Top Layer 1 w0.14: -22.3,4.49 -10.99,4.49 U1.K12@-10.5,4
  Top Layer 1 w0.254: BANK_38.15@-88.92,19.8 -88.92,17.2 -84.47,12.75 -34.75,12.75 -26.49,4.49 -22.3,4.49
K13: BANK_38.31 U1.K13 | length 66.1
  IN_Layer 6 w0.14: -22.05,3.49 -10.01,3.49 U1.K13@-9.5,4
  IN_Layer 6 w0.254: BANK_38.31@-68.6,19.8 -62.926,14.126 -48.724,14.126 -38.088,3.49 -22.05,3.49
K14: BANK_38.43 U1.K14 | length 51.4
  Bottom Layer w0.14: -22.1,4.49 -8.99,4.49 U1.K14@-8.5,4
  Bottom Layer w0.254: BANK_38.43@-53.36,19.8 -38.05,4.49 -22.1,4.49
K16: BANK_39.17 U1.K16 | length 83.3
  IN_Layer 7 w0.14: -22.1,3.093 -21.703,3.49 -7.01,3.49 U1.K16@-6.5,4
  IN_Layer 7 w0.254: BANK_39.17@-86.38,3.3 -82.58,-0.5 -25.693,-0.5 -22.1,3.093
K17: BANK_39.20 U1.K17 | length 81.9
  IN_Layer 8 w0.14: -22.1,4.681 -21.929,4.51 -6.01,4.51 U1.K17@-5.5,4
  IN_Layer 8 w0.254: BANK_39.20@-83.84,5.84 -80.409,9.271 -26.69,9.271 -22.1,4.681
K18: BANK_39.50 U1.K18 | length 43.7
  IN_Layer 9 w0.14: -22.1,2.5 -5.307,2.5 -4.99,2.817 -4.99,3.51 U1.K18@-4.5,4
  IN_Layer 9 w0.254: BANK_39.50@-45.74,5.84 -42.4,2.5 -22.1,2.5
K19: BANK_37.23 U1.K19 | length 63.4
  IN_Layer 10 w0.14: -22.1,3.51 -3.99,3.51 U1.K19@-3.5,4
  IN_Layer 10 w0.254: BANK_37.23@-43.86,37.8 -43.86,30.61 -31,17.75 -31,10.25 -24.26,3.51 -22.1,3.51
K21: BANK_37.17 U1.K21 | length 75.6
  IN_Layer 10 w0.14: -22.143,0.5 -1.092,0.5 -1.01,0.582 -1.01,3.51 U1.K21@-1.5,4
  IN_Layer 10 w0.254: BANK_37.17@-51.48,37.8 -51.48,35.954 -32.5,16.974 -32.5,8.5 -24.5,0.5 -22.143,0.5
K22: BANK_37.15 U1.K22 | length 79.7
  IN_Layer 10 w0.14: -22.1,-0.5 -0.092,-0.5 -0.01,-0.418 -0.01,3.51 U1.K22@-0.5,4
  IN_Layer 10 w0.254: BANK_37.15@-54.02,37.8 -33,16.78 -33,8 -24.5,-0.5 -22.1,-0.5
K23: BANK_17.29 U1.K23 | length 65.5
  IN_Layer 9 w0.14: U1.K23@0.5,4 1,4.5 1,14
  IN_Layer 9 w0.254: 1,14 13.379,26.379 35.039,26.379 BANK_17.29@46.46,37.8
K24: BANK_17.37 U1.K24 | length 79.6
  IN_Layer 8 w0.14: U1.K24@1.5,4 2,4.5 2,14
  IN_Layer 8 w0.254: 2,14 2,16.892 16.608,31.5 55.75,31.5 56.62,32.37 BANK_17.37@56.62,37.8
K26: BANK_17.26 U1.K26 | length 63
  IN_Layer 10 w0.14: U1.K26@3.5,4 4,4.5 22.75,4.5
  IN_Layer 10 w0.254: 22.75,4.5 37.874,19.624 37.874,27.624 40.25,30 40.25,39.21 BANK_17.26@41.38,40.34
K27: BANK_19.1 U1.K27 | length 41.6
  IN_Layer 9 w0.14: U1.K27@4.5,4 5.01,3.49 21.784,3.49 21.974,3.3 22.3,3.3
  IN_Layer 9 w0.254: 22.3,3.3 BANK_19.1@45.8,3.3
K28: BANK_19.35 U1.K28 | length 86.1
  IN_Layer 8 w0.14: U1.K28@5.5,4 5.99,3.51 22.24,3.51 22.3,3.45
  IN_Layer 8 w0.254: 22.3,3.45 25.25,0.5 86.18,0.5 BANK_19.35@88.98,3.3
K29: BANK_19.36 U1.K29 | length 88
  IN_Layer 7 w0.14: U1.K29@6.5,4 7.01,3.49 22.255,3.49 22.3,3.445
  IN_Layer 7 w0.254: 22.3,3.445 24.887,0.857 25.25,0.37 86.37,0.37 87.75,1.75 87.75,4.61 BANK_19.36@88.98,5.84
K31: BANK_18.9 U1.K31 | length 55.5
  Bottom Layer w0.14: U1.K31@8.5,4 8.99,3.51 22.3,3.51
  Bottom Layer w0.254: 22.3,3.51 38.888,3.51 50.047,14.669 52.669,14.669 55.96,17.96 BANK_18.9@55.96,19.8
K32: BANK_18.17 U1.K32 | length 63.2
  IN_Layer 6 w0.14: U1.K32@9.5,4 9.99,4.49 22.3,4.49
  IN_Layer 6 w0.254: 22.3,4.49 38.809,4.49 48.819,14.5 60.82,14.5 BANK_18.17@66.12,19.8
K33: BANK_18.35 U1.K33 | length 86.5
  Top Layer 1 w0.14: U1.K33@10.5,4 10.99,4.49 22.3,4.49
  Top Layer 1 w0.254: 22.3,4.49 26.99,4.49 35.25,12.75 84.47,12.75 88.98,17.26 BANK_18.35@88.98,19.8
L13: BANK_38.13 U1.L13 | length 90.5
  Top Layer 1 w0.14: -22.3,3.51 -10.01,3.51 U1.L13@-9.5,3
  Top Layer 1 w0.254: BANK_38.13@-91.46,19.8 -91.46,17.2 -86.239,11.979 -41.827,11.979 -41.806,12 -35.5,12 -27.01,3.51 -22.3,3.51
L14: BANK_38.29 U1.L14 | length 70
  IN_Layer 6 w0.14: -22.05,2.5 -9,2.5 U1.L14@-8.5,3
  IN_Layer 6 w0.254: BANK_38.29@-71.14,19.8 -65.092,13.752 -48.879,13.752 -37.627,2.5 -22.05,2.5
L15: BANK_38.41 U1.L15 | length 55.3
  Bottom Layer w0.14: -22.1,3.5 -8,3.5 U1.L15@-7.5,3
  Bottom Layer w0.254: BANK_38.41@-55.9,19.8 -39.297,3.5 -22.1,3.5
L16: BANK_39.15 U1.L16 | length 85.9
  IN_Layer 7 w0.14: -22.1,2.093 -21.703,2.49 -7.01,2.49 U1.L16@-6.5,3
  IN_Layer 7 w0.254: BANK_39.15@-88.92,3.3 -84.62,-1 -25.193,-1 -22.1,2.093
L18: BANK_39.22 U1.L18 | length 80.5
  IN_Layer 8 w0.14: -22.1,3.51 -5.01,3.51 U1.L18@-4.5,3
  IN_Layer 8 w0.254: BANK_39.22@-81.3,5.84 -78.243,8.897 -27.647,8.897 -22.26,3.51 -22.1,3.51
L19: BANK_37.11 U1.L19 | length 83.9
  IN_Layer 9 w0.14: U1.L19@-3.5,3 -3.01,3.49 -1.317,3.49 -1.01,3.797 -1.01,14
  IN_Layer 9 w0.254: BANK_37.11@-59.1,37.8 -47.55,26.25 -8.25,26.25 -1.01,19.01 -1.01,14
L20: BANK_37.21 U1.L20 | length 66.5
  IN_Layer 10 w0.14: -22.1,2.51 -2.99,2.51 U1.L20@-2.5,3
  IN_Layer 10 w0.254: BANK_37.21@-46.4,37.8 -46.4,32.4 -31.5,17.5 -31.5,9.699 -24.311,2.51 -22.1,2.51
L21: BANK_37.19 U1.L21 | length 70.6
  IN_Layer 10 w0.14: -22.1,1.5 -2.072,1.5 -1.99,1.582 -1.99,2.51 U1.L21@-1.5,3
  IN_Layer 10 w0.254: BANK_37.19@-48.94,37.8 -48.94,34.19 -32,17.25 -32,9 -24.5,1.5 -22.1,1.5
L23: BANK_17.35 U1.L23 | length 77.9
  IN_Layer 8 w0.14: U1.L23@0.5,3 1,3.5 1,14
  IN_Layer 8 w0.254: 1,14 1,16.421 17.412,32.834 53.164,32.834 54.08,33.75 BANK_17.35@54.08,37.8
L24: BANK_17.39 U1.L24 | length 84
  IN_Layer 8 w0.14: U1.L24@1.5,3 1.99,3.49 2.683,3.49 3,3.807 3,14
  IN_Layer 8 w0.254: 3,14 3,17.363 15.618,29.982 58.141,29.982 59.16,31 BANK_17.39@59.16,37.8
L25: BANK_17.49 U1.L25 | length 89.7
  IN_Layer 7 w0.14: U1.L25@2.5,3 2.99,3.49 4.683,3.49 5,3.807 5,14
  IN_Layer 7 w0.254: 5,14 7.992,16.992 30.232,16.992 42.24,29 63.06,29 BANK_17.49@71.86,37.8
L26: BANK_17.28 U1.L26 | length 65.1
  IN_Layer 10 w0.14: U1.L26@3.5,3 4,3.5 22.75,3.5
  IN_Layer 10 w0.254: 22.75,3.5 38.25,19 38.25,27.25 42.75,31.75 42.75,39.17 BANK_17.28@43.92,40.34
L28: BANK_19.37 U1.L28 | length 88.8
  IN_Layer 8 w0.14: U1.L28@5.5,3 5.99,2.51 22.24,2.51 22.3,2.45
  IN_Layer 8 w0.254: 22.3,2.45 25,-0.25 87.97,-0.25 BANK_19.37@91.52,3.3
L29: BANK_19.38 U1.L29 | length 90.3
  IN_Layer 7 w0.14: U1.L29@6.5,3 7.01,2.49 21.756,2.49 22.3,1.946
  IN_Layer 7 w0.254: 22.3,1.946 24.25,-0.004 88.496,-0.004 90.25,1.75 90.25,4.57 BANK_19.38@91.52,5.84
L30: BANK_18.11 U1.L30 | length 59.6
  Bottom Layer w0.14: U1.L30@7.5,3 8,2.5 22.3,2.5
  Bottom Layer w0.254: 22.3,2.5 38.75,2.5 50.25,14 54.75,14 58.5,17.75 BANK_18.11@58.5,19.8
L31: BANK_18.19 U1.L31 | length 67.1
  IN_Layer 6 w0.14: U1.L31@8.5,3 8.99,3.49 22.3,3.49
  IN_Layer 6 w0.254: 22.3,3.49 38.338,3.49 48.974,14.126 62.986,14.126 BANK_18.19@68.66,19.8
L33: BANK_18.37 U1.L33 | length 89.5
  Top Layer 1 w0.14: U1.L33@10.5,3 11.01,3.51 22.3,3.51
  Top Layer 1 w0.254: 22.3,3.51 27.26,3.51 35.75,12 86.26,12 91.52,17.26 BANK_18.37@91.52,19.8
l_sh_B9: P18.7 U4.B1 | length 35.3
  Bottom Layer w0.254: P18.7@68.95,-43.04 72.91,-47 99.5,-47 100.761,-45.739 100.761,-44.514 U4.B1@100.825,-44.45
l_sh_B10: P18.8 U4.B2 | length 41.4
  Bottom Layer w0.254: P18.8@68.95,-40.5 67.75,-41.7 67.75,-43.25 71.874,-47.374 100.626,-47.374 102.125,-45.875 U4.B2@102.125,-44.45
l_sh_B11: P18.5 U4.B3 | length 40.6
  Bottom Layer w0.254: P18.5@66.41,-43.04 71.118,-47.748 101.002,-47.748 102.775,-45.975 U4.B3@102.775,-44.45
l_sh_B12: P18.6 U4.B4 | length 45.9
  Bottom Layer w0.254: P18.6@66.41,-40.5 65.25,-41.66 65.25,-43.29 70.082,-48.122 101.378,-48.122 103.425,-46.075 U4.B4@103.425,-44.45
l_sh_B13: P18.3 U4.B5 | length 45.2
  Bottom Layer w0.254: P18.3@63.87,-43.04 69.326,-48.496 101.754,-48.496 104.075,-46.175 U4.B5@104.075,-44.45
l_sh_B14: P18.4 U4.B6 | length 50.7
  Bottom Layer w0.254: P18.4@63.87,-40.5 62.5,-41.87 62.5,-43.08 68.29,-48.87 102.13,-48.87 104.725,-46.275 U4.B6@104.725,-44.45
l_sh_B15: P18.1 U4.B7 | length 49.7
  Bottom Layer w0.254: P18.1@61.33,-43.04 67.54,-49.25 102.5,-49.25 105.375,-46.375 U4.B7@105.375,-44.45
l_sh_B16: P18.2 U4.B8 | length 55.6
  Bottom Layer w0.254: P18.2@61.33,-40.5 60,-41.83 60,-43.559 66.191,-49.75 102.75,-49.75 106.025,-46.475 U4.B8@106.025,-44.45
M0: R11.2 S1.4 U1.AG11 | length 167.5
  Top Layer 1 w0.14: U1.AG11@-11.5,-13 -11.01,-13.49 -3.149,-13.49 -3,-13.341 -3,14
  Top Layer 1 w0.254: R11.2@-89.81,66.545 -88.695,66.545 -88,65.85 -88,62.65 -84.9,59.55 -77.1,59.55 -74.5,56.95 S1.4@-74.5,55.04 -74.5,35 -72.75,33.25 -8.5,33.25 -3,27.75 -3,14
M1: R13.2 S1.3 U1.AG10 | length 160.1
  Top Layer 1 w0.14: U1.AG10@-12.5,-13 -12,-12.5 -4.149,-12.5 -4,-12.351 -4,14
  Top Layer 1 w0.254: R13.2@-89.81,61.012 -88.062,61.012 -85.6,58.55 -78.949,58.55 -77.04,56.641 S1.3@-77.04,55.04 -77.04,35.79 -73.918,32.668 -9.918,32.668 -4,26.75 -4,14
M2: R15.2 S1.2 U1.AF10 | length 154.9
  Top Layer 1 w0.14: U1.AF10@-12.484,-11.984 -12.01,-11.51 -5.317,-11.51 -5.01,-11.203 -5.01,14
  Top Layer 1 w0.254: R15.2@-89.81,55.478 -89.768,55.52 -87.887,55.52 -85.806,57.602 -80.706,57.602 -79.596,56.492 -79.596,55.056 S1.2@-79.58,55.04 ; S1.2@-79.588,55.048 -79.588,36.838 -74.923,32.173 -11.799,32.173 -5.01,25.384 -5.01,14
M12: BANK_38.11 U1.M12 | length 92.1
  Top Layer 1 w0.14: -22.3,2.5 -11,2.5 U1.M12@-10.5,2
  Top Layer 1 w0.254: BANK_38.11@-94,19.8 -94,17.729 -87.521,11.25 -36.275,11.25 -27.525,2.5 -22.3,2.5
M13: BANK_38.27 U1.M13 | length 72
  IN_Layer 6 w0.14: -22.05,1.49 -10.01,1.49 U1.M13@-9.5,2
  IN_Layer 6 w0.254: BANK_38.27@-73.68,19.8 -67.258,13.378 -49.033,13.378 -37.145,1.49 -22.05,1.49
M15: BANK_38.39 U1.M15 | length 58.1
  Bottom Layer w0.14: -22.1,2.5 -8,2.5 U1.M15@-7.5,2
  Bottom Layer w0.254: BANK_38.39@-58.44,19.8 -53.083,14.443 -51.246,14.443 -50.981,14.179 -50.917,14.118 -39.457,3.126 -38.714,2.5 -22.1,2.5
M16: BANK_39.13 U1.M16 | length 88.4
  IN_Layer 7 w0.14: -22.1,1.174 -21.784,1.49 -7.01,1.49 U1.M16@-6.5,2
  IN_Layer 7 w0.254: BANK_39.13@-91.46,3.3 -86.66,-1.5 -24.774,-1.5 -22.1,1.174
M17: BANK_39.24 U1.M17 | length 76.8
  IN_Layer 8 w0.14: -22,2.5 -6,2.5 U1.M17@-5.5,2
  IN_Layer 8 w0.254: BANK_39.24@-78.76,5.84 -76.35,8.25 -28.25,8.25 -22.5,2.5 -22,2.5
M18: BANK_39.49 U1.M18 | length 42.2
  IN_Layer 9 w0.14: -22.1,1.51 -4.99,1.51 U1.M18@-4.5,2
  IN_Layer 9 w0.254: BANK_39.49@-45.74,3.3 -43.95,1.51 -22.1,1.51
M20: BANK_37.13 U1.M20 | length 83.8
  IN_Layer 9 w0.14: U1.M20@-2.5,2 -2.01,2.49 -0.317,2.49 0,2.807 0,14
  IN_Layer 9 w0.254: BANK_37.13@-56.56,37.8 -46.338,27.578 -7.828,27.578 0,19.75 0,14
M21: BANK_37.5 U1.M21 | length 95.3
  IN_Layer 8 w0.14: -2,14 -2,2.5 U1.M21@-1.5,2
  IN_Layer 8 w0.254: BANK_37.5@-66.72,37.8 -62.127,33.207 -6.707,33.207 -2,28.5 -2,14
M22: BANK_37.9 U1.M22 | length 92.5
  IN_Layer 8 w0.14: U1.M22@-0.5,2 0,2.5 0,14
  IN_Layer 8 w0.254: BANK_37.9@-61.64,37.8 -58.122,34.282 -5.282,34.282 0,29 0,14
M23: BANK_17.41 U1.M23 | length 82.8
  IN_Layer 7 w0.14: U1.M23@0.5,2 1,2.5 1,14
  IN_Layer 7 w0.254: 1,14 5.877,18.877 29.637,18.877 44.854,34.094 57.994,34.094 BANK_17.41@61.7,37.8
M25: BANK_17.43 U1.M25 | length 84.3
  IN_Layer 7 w0.14: 2,14 2,2.5 U1.M25@2.5,2
  IN_Layer 7 w0.254: 2,14 6.438,18.438 29.818,18.438 43.88,32.5 58.94,32.5 BANK_17.43@64.24,37.8
M26: BANK_17.30 U1.M26 | length 67.1
  IN_Layer 10 w0.14: U1.M26@3.5,2 4,2.5 22.75,2.5
  IN_Layer 10 w0.254: 22.75,2.5 38.75,18.5 38.75,27 45.413,33.663 45.413,39.293 BANK_17.30@46.46,40.34
M27: BANK_19.3 U1.M27 | length 44.8
  IN_Layer 9 w0.14: U1.M27@4.5,2 4.502,2 5.002,2.5 22.3,2.5
  IN_Layer 9 w0.254: 22.3,2.5 23.5,2.5 24,2 47.04,2 BANK_19.3@48.34,3.3
M28: BANK_19.39 U1.M28 | length 91.6
  IN_Layer 8 w0.14: U1.M28@5.5,2 5.99,1.51 22.24,1.51 22.3,1.45
  IN_Layer 8 w0.254: 22.3,1.45 24.75,-1 89.76,-1 BANK_19.39@94.06,3.3
M30: BANK_19.40 U1.M30 | length 92
  IN_Layer 7 w0.14: U1.M30@7.5,2 8.01,1.49 21.703,1.49 22.3,0.893
  IN_Layer 7 w0.254: 22.3,0.893 23.571,-0.378 91.122,-0.378 92.517,1.017 92.517,4.297 BANK_19.40@94.06,5.84
M31: BANK_18.13 U1.M31 | length 61.4
  Bottom Layer w0.14: U1.M31@8.5,2 9,1.5 22.3,1.5
  Bottom Layer w0.254: 22.3,1.5 38.75,1.5 50.75,13.5 56.5,13.5 61.04,18.04 BANK_18.13@61.04,19.8
M32: BANK_18.21 U1.M32 | length 69.1
  IN_Layer 6 w0.14: U1.M32@9.5,2 10,2.5 22.3,2.5
  IN_Layer 6 w0.254: 22.3,2.5 37.877,2.5 49.129,13.752 65.152,13.752 BANK_18.21@71.2,19.8
M33: BANK_18.39 U1.M33 | length 92.1
  Top Layer 1 w0.14: U1.M33@10.5,2 11,2.5 22.3,2.5
  Top Layer 1 w0.254: 22.3,2.5 27.525,2.5 36.275,11.25 87.521,11.25 94.06,17.789 BANK_18.39@94.06,19.8
N12: BANK_38.9 U1.N12 | length 95
  Top Layer 1 w0.14: -22.3,1.51 -11.01,1.51 U1.N12@-10.5,1
  Top Layer 1 w0.254: BANK_38.9@-96.54,19.8 -96.54,17.79 -89.25,10.5 -37,10.5 -28.01,1.51 -22.3,1.51
N13: BANK_38.25 U1.N13 | length 74.9
  IN_Layer 6 w0.14: -22.05,0.49 -10.01,0.49 U1.N13@-9.5,1
  IN_Layer 6 w0.254: BANK_38.25@-76.22,19.8 -69.424,13.004 -49.188,13.004 -36.674,0.49 -22.05,0.49
N14: BANK_38.37 U1.N14 | length 60.3
  Bottom Layer w0.14: -22.1,1.5 -9,1.5 U1.N14@-8.5,1
  Bottom Layer w0.254: BANK_38.37@-60.98,19.8 -54.701,13.521 -50.84,13.521 -38.819,1.5 -22.1,1.5
N15: BANK_39.11 U1.N15 | length 89.9
  IN_Layer 7 w0.14: -22.1,0.174 -21.784,0.49 -8.01,0.49 U1.N15@-7.5,1
  IN_Layer 7 w0.254: BANK_39.11@-94,3.3 -88.7,-2 -24.274,-2 -22.1,0.174
N17: BANK_39.26 U1.N17 | length 74.1
  IN_Layer 8 w0.14: -22.1,1.5 -6,1.5 U1.N17@-5.5,1
  IN_Layer 8 w0.254: BANK_39.26@-76.22,5.84 -74.56,7.5 -28.5,7.5 -22.5,1.5 -22.1,1.5
N18: BANK_39.47 U1.N18 | length 45.1
  IN_Layer 9 w0.14: -22.1,0.51 -4.99,0.51 U1.N18@-4.5,1
  IN_Layer 9 w0.254: BANK_39.47@-48.28,3.3 -45.49,0.51 -22.1,0.51
N19: BANK_37.1 U1.N19 | length 99.1
  IN_Layer 8 w0.14: -4,14 -4,1.5 U1.N19@-3.5,1
  IN_Layer 8 w0.254: BANK_37.1@-71.8,37.8 -66.132,32.132 -8.132,32.132 -4,28 -4,14
N20: BANK_37.3 U1.N20 | length 97.7
  IN_Layer 8 w0.14: -3,14 -3,1.5 U1.N20@-2.5,1
  IN_Layer 8 w0.254: BANK_37.3@-69.26,37.8 -64.144,32.684 -7.434,32.684 -3,28.25 -3,14
N22: BANK_37.7 U1.N22 | length 94.9
  IN_Layer 8 w0.14: -1,14 -1,1.5 U1.N22@-0.5,1
  IN_Layer 8 w0.254: BANK_37.7@-64.18,37.8 -60.124,33.744 -5.994,33.744 -1,28.75 -1,14
N23: BANK_17.7 U1.N23 | length 44.5
  IN_Layer 6 w0.14: U1.N23@0.5,1 0.99,1.49 0.99,2.183 1.297,2.49 1.683,2.49 2,2.807 2,14
  IN_Layer 6 w0.254: 2,14 2,16 18.52,32.52 BANK_17.7@18.52,37.8
N24: BANK_17.9 U1.N24 | length 45.3
  IN_Layer 6 w0.14: U1.N24@1.5,1 1.99,1.49 2.683,1.49 3,1.807 3,14
  IN_Layer 6 w0.254: 3,14 3,15.5 21.06,33.56 BANK_17.9@21.06,37.8